# Altium PCB 电源板.PcbDoc
Units mil, origin at the board's own origin, x right, y up, seen from the top; angles counter-clockwise.
Board outline 2515 x 1990 mil, 2 copper layers (Top Layer, Bottom Layer); 44 components, 20 nets, 273 pads, 58 vias.
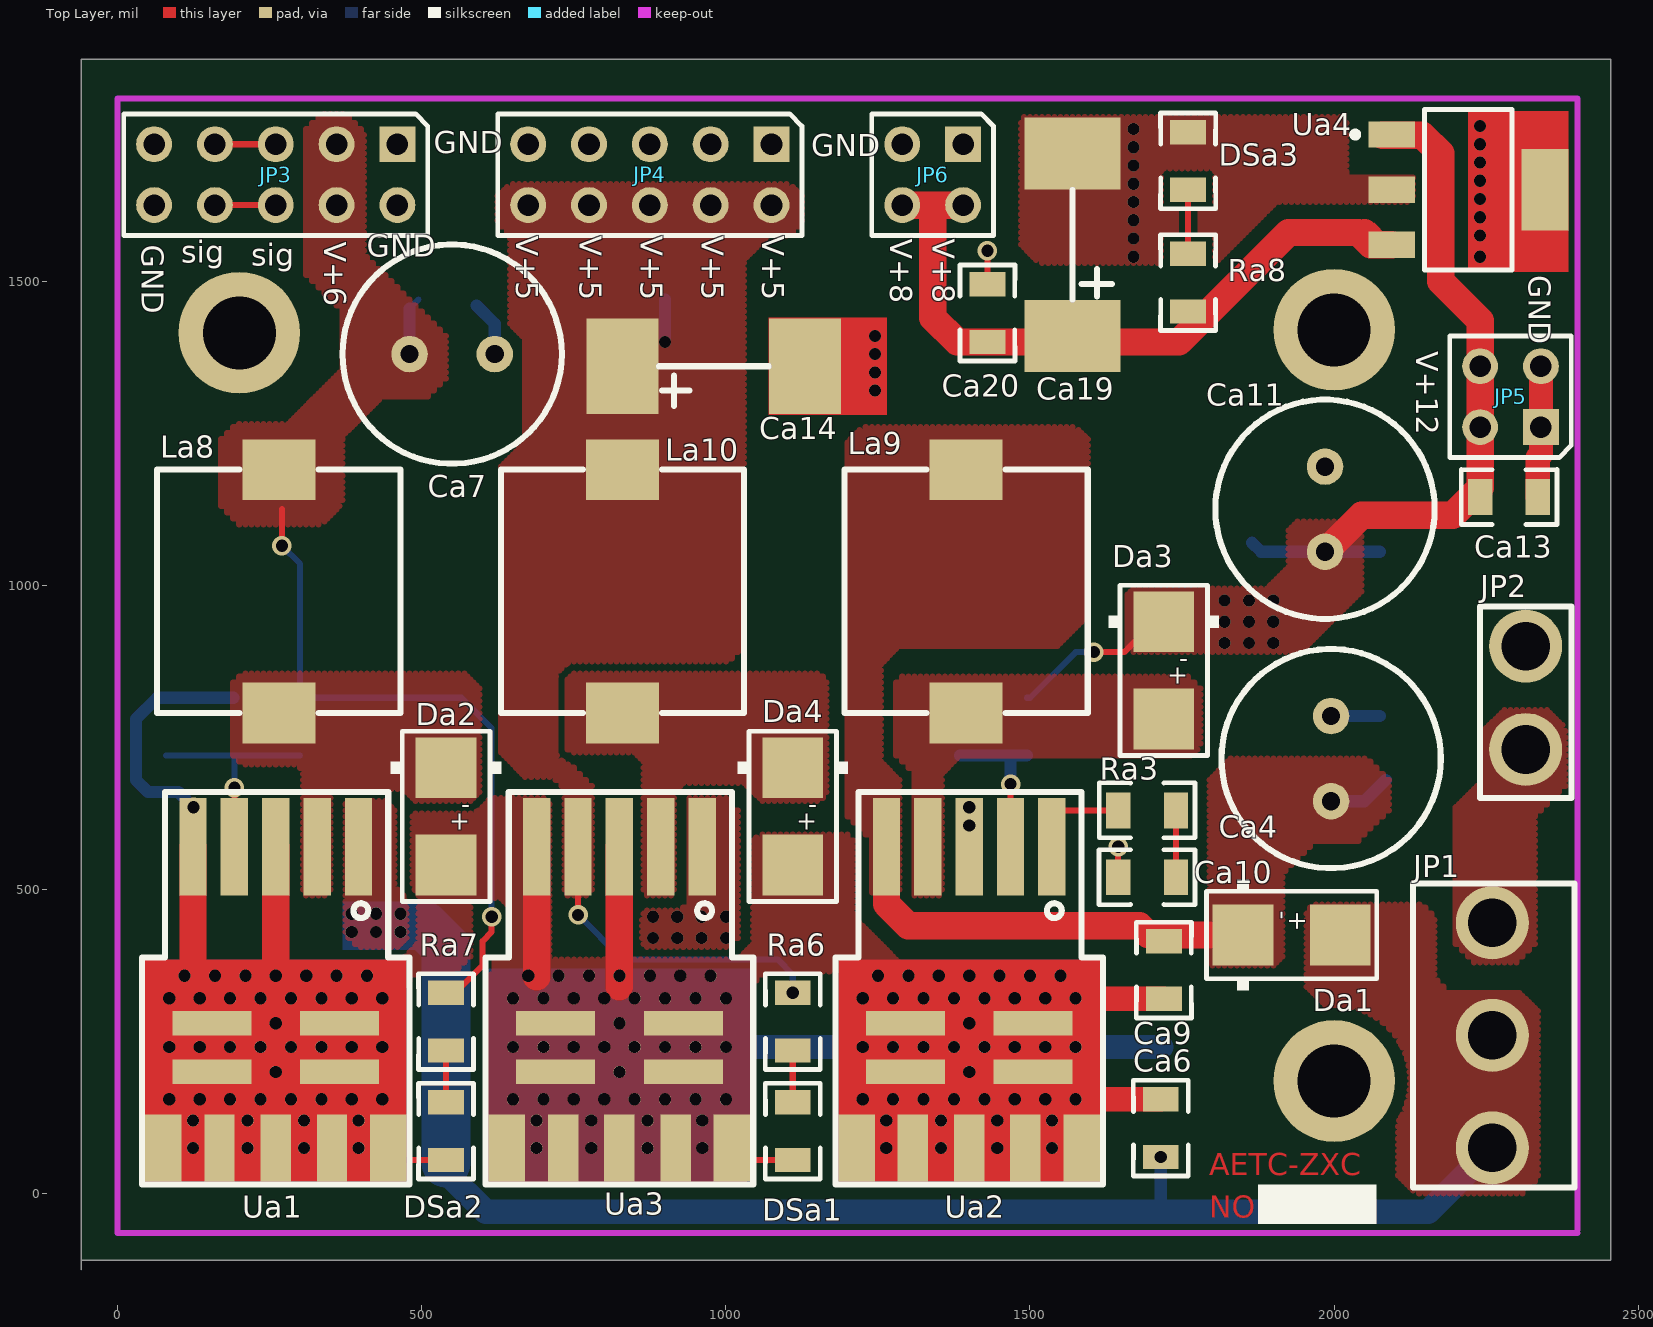
[diagram p0: Top Layer view]
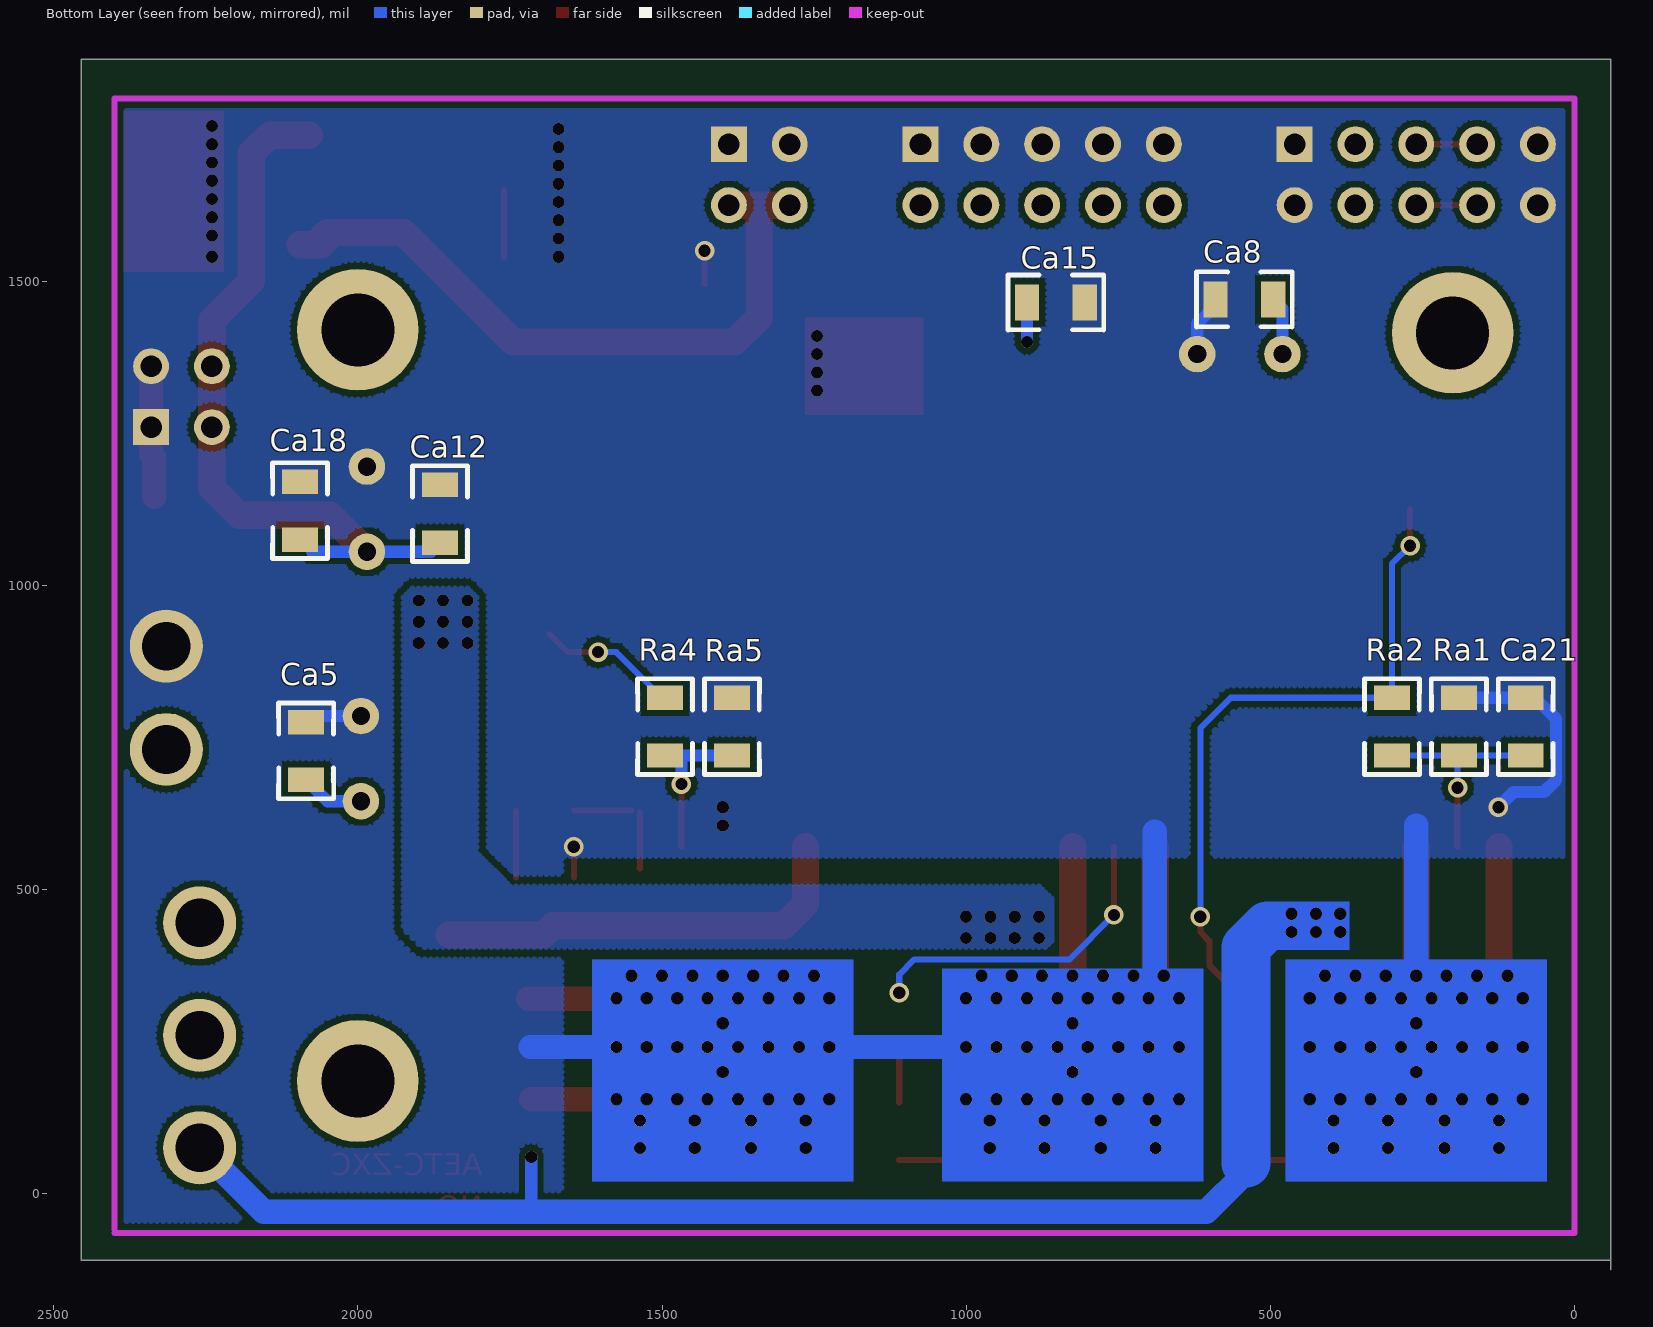
[diagram p1: Bottom Layer view, seen from below]

## Layer stack, top to bottom
Top Layer: signal copper 1.4
Dielectric: dielectric 12.6, FR-4, Dk 4.8
Bottom Layer: signal copper 1.4

## Board outline
-60,-125 -60,1865 2455,1865 2455,-110 -60,-110

## Design rules (kind name [scope] priority, off if disabled: settings)
Clearance [All] p1: gap=10
ComponentClearance [All] p1: gap=0 collisioncheckmode=0
PolygonConnect [All] p1: connectstyle=Direct reliefconductorwidth=10 reliefentries=4 polygonreliefangle="90 Angle"
RoutingLayers [All] p1: top layer=Horizontal bottom layer=Vertical
RoutingVias [All] p1: holewidth=28 width=50 viastyle="Through Hole" minholewidth=28 minwidth=50 maxholewidth=28 maxwidth=50
SolderMaskExpansion [All] p1: expansion=4
TestPointUsage [All] p1: valid=0 allowmultiple=FALSE
Testpoint [All] p1: side=15 testpointundercomponent=TRUE minsize=40 maxsize=100 preferedsize=60 minholesize=0 maxholesize=40 preferedholesize=32 testpointgrid=1 style=1023 order=-539222988
Width [All] p1: maxlimit=80 minlimit=10 preferedwidth=10 toplayer_prefwidth=40 bottomlayer_prefwidth=40 minimp=50.000000 maximp=50.000000 favimp=50.000000
16 further rules are at their usual default settings.

## Components (designator, comment, footprint, x,y, rotation, side; value= is the part's Value field where it differs from the comment)
Ca4 "Cap Pol1" 470U 1995,715 r180 top
Ca5 "Cap" CR2012-0805 2085,725 r90 bottom
Ca6 "Cap" CR2012-0805 1715,105 r90 top
Ca7 "Cap Pol1" 470U 550,1380 r90 top
Ca8 "Cap" CR2012-0805 540,1470 r0 bottom
Ca9 "Cap" CR2012-0805 1720,370 r270 top
Ca10 "Cap" CR2012-0805 1695,520 r180 top
Ca11 "Cap Pol1" 470U 1985,1125 r180 top
Ca12 "Cap" CR2012-0805 1865,1115 r90 bottom
Ca13 "Cap" CR2012-0805 2285,1145 r0 top
Ca14 "Cap Pol1" 100u 980,1360 r270 top
Ca15 "Cap" CR2012-0805 855,1465 r180 bottom
Ca18 "Cap" CR2012-0805 2095,1120 r90 bottom
Ca19 "Cap Pol1" 100u 1570,1560 r0 top
Ca20 "Cap" CR2012-0805 1430,1445 r90 top
Ca21 "Cap" CR2012-0805 80,770 r270 bottom
Da1 "Diode_UFR" DO-214-SMB-YX1 1930,425 r180 top
Da2 "Diode_UFR" DO-214-SMB-YX1 540,620 r90 top
Da3 "Diode_UFR" DO-214-SMB-YX1 1720,860 r90 top
Da4 "Diode_UFR" DO-214-SMB-YX1 1110,620 r90 top
DSa1 "LED1" CR2012-0805 1110,105 r270 top
DSa2 "LED1" CR2012-0805 540,105 r270 top
DSa3 "LED1" CR2012-0805 1760,1695 r90 top
JP1 "Header 3" KG_3 2260,260 r270 top
JP2 "Header 2" CON_X2_B 2315,815 r90 top
JP3 "Header 5X2" HDR2X5 260,1675 r0 top
JP4 "Header 5X2" HDR2X5 875,1675 r0 top
JP5 "Header 2X2" HDR2X2 2290,1310 r270 top
JP6 "Header 2X2" HDR2X2 1340,1675 r0 top
La8 "Inductor" INDUCTOR-YX14 265,990 r180 top
La9 "Inductor" INDUCTOR-YX14 1395,990 r0 top
La10 "Inductor" INDUCTOR-YX14 830,990 r180 top
Ra1 "Res2" CR2012-0805 190,770 r270 bottom
Ra2 "Res2" CR2012-0805 300,765 r90 bottom
Ra3 "Res2" CR2012-0805 1690,630 r0 top
Ra4 "Res2" CR2012-0805 1495,770 r270 bottom
Ra5 "Res2" CR2012-0805 1385,765 r90 bottom
Ra6 "Res3" CR2012-0805 1110,280 r90 top
Ra7 "Res3" CR2012-0805 540,280 r90 top
Ra8 "Res3" CR2012-0805 1760,1500 r270 top
Ua1 "LM2596T-ADJ" LM2596 260,280 r180 top
Ua2 "LM2587T-ADJ" LM2596 1400,280 r180 top
Ua3 "LM2596T-5.0" LM2596 825,280 r180 top
Ua4 "LM2940S8.0" SOT-223 2205,1655 r270 top

## Footprints (in the part's own frame and the unit in brackets; to place one, negate y for a bottom-side part, rotate by r counter-clockwise, add the part's x,y. Pads: shape width x height; smd on the part's side, far side on the other; paste and mask are expansions set on the pad)
100u [mm]
  rect 4x3 smd: 1(0,-3.81) 2(0,3.81)
  silkscreen extent 0,-2.29 1.65,2.29
470U [mil]
  round 60 hole 30: 1(0,70) 2(0,-70)
  silkscreen extent -180,-180 180,180
CON_X2_B [mil]
  round 120 hole 80: 1(85,0) 2(-85,0)
  silkscreen extent -165,-75 150,75
CR2012-0805 [mil]
  rect 40x59.05 smd: 1(-45,0) 2(50,0)
  silkscreen extent -76,-45 81,45
DO-214-SMB-YX1 [mil]
  rect 100x100 smd: 1(-80,0) 2(80,0)
  silkscreen extent -140,-91 140,91
HDR2X2 [mm]
  rect 1.5x1.5 hole 0.9: 1(1.27,1.27)
  round 1.5 hole 0.9: 2(1.27,-1.27) 3(-1.27,1.27) 4(-1.27,-1.27)
  silkscreen extent -2.54,-2.54 2.54,2.54
HDR2X5 [mm]
  rect 1.5x1.5 hole 0.9: 1(5.08,1.27)
  round 1.5 hole 0.9: 2(5.08,-1.27) 3(2.54,1.27) 4(2.54,-1.27) 5(0,1.27) 6(0,-1.27) 7(-2.54,1.27) 8(-2.54,-1.27) 9(-5.08,1.27) 10(-5.08,-1.27)
  silkscreen extent -6.35,-2.54 6.35,2.54
INDUCTOR-YX14 [mil]
  rect 120x100 smd: 1(0,200) 2(0,-200)
  silkscreen extent -200,-200 200,200
KG_3 [mil]
  round 120 hole 80: 1(-185,0) 2(0,0) 3(185,0)
  silkscreen extent -250,-130 250,135
LM2596 [mil]
  rect 45x160 smd: 1(-136,-290) 2(-68,-290) 3(0,-290) 4(68,-290) 5(136,-290)
  rect 60x110 smd: 3(-185,205) 3(185,205)
  round 20 hole 20: 3(-175,125) 3(-175,-41) 3(-175,39) 3(-150,-78) 3(-136.25,160) 3(-136.25,205) 3(-125,125) 3(-125,-41) 3(-125,39) 3(-100,-78) 3(-75,125) 3(-75,-41) 3(-75,39) 3(-50,-78) 3(-46.25,205) 3(-46.25,160) 3(-25,125) 3(-25,39) 3(-25,-41) 3(0,80) 3(0,0) 3(0,-78) 3(25,125) 3(25,39) 3(25,-41) 3(46.25,205) 3(46.25,160) 3(50,-78) 3(75,125) 3(75,-41) 3(75,39) 3(100,-78) 3(125,125) 3(125,-41) 3(125,39) 3(136.25,160) 3(136.25,205) 3(150,-78) 3(175,125) 3(175,-41) 3(175,39)
  rect 130x40 smd: 3(-105,80) 3(-105,0) 3(105,80) 3(105,0)
  rect 50x110 smd: 3(-92.5,205) 3(0,205) 3(92.5,205)
  silkscreen extent -220,-380 220,265
SOT-223 [mm]
  rect 1.1x1.95 smd: 1(-2.183,-2.803) 2(0.117,-2.803) 3(2.417,-2.803)
  rect 3.4x1.95 smd: 2(0.117,3.597)
  silkscreen extent -3.23,-4.45 3.47,2.22

## Part data
Ca4 Ca7 Ca11 Ca14 Ca19: "Polarized Capacitor (Radial)"
Ca5 Ca6 Ca8 Ca9 Ca10 Ca12 Ca13 Ca15 Ca18 Ca20 Ca21: "Capacitor"
Da1 Da2 Da3 Da4: "Ultra-Fast Rectifier Diode"
DSa1 DSa2 DSa3: "Typical RED GaAs LED"
JP1: "Header, 3-Pin"
JP2: "Header, 2-Pin"
JP3 JP4: "Header, 5-Pin, Dual row"
JP5 JP6: "Header, 2-Pin, Dual row"
Ra1 Ra2 Ra3 Ra4 Ra5 Ra6 Ra7 Ra8: "Resistor"
Ua1: library part LM2596T-5.0, "Simple Switcher Power Converter 150 kHz 3A Step Down Voltage Regulator"
Ua2: "Simple Switcher 5A Flyback Regulator"
Ua3: "Simple Switcher Power Converter 150 kHz 3A Step Down Voltage Regulator"
Ua4: "1A Low-Dropout Regulator"

## Free pads (board coordinates)
  round 200 hole 120: 0(200,1415) 0(2000,185) 0(2000,1420)

## Via types
v1: diameter 20, hole 20, Top Layer to Bottom Layer, 48 vias
v2: diameter 32, hole 20, Top Layer to Bottom Layer, 10 vias

## Nets (pads, with @x,y where several pads share a name; then routed paths per layer and width w, separated by ;. In a path a pad name is that pad's centre, name@x,y a point inside that pad or via, vN(x,y) a via of type N, cw(c..) or ccw(c..) an arc to the next point about the centre after c; other vN are vias at no path point)
NetCa10_1: Ca10.1 Ra3.2 | length 110
  Top Layer w10: Ca10.1 Ra3.2
NetCa21_2: Ca21.2 Ra1.2 Ra2.1 Ua1.4 | length 370.8
  Top Layer w10: Ua1.4 v2(192,667)
  Bottom Layer w10: Ca21.2 Ra2.1 ; Ra1.2 192,718 v2(192,667)
NetDa2_2: Da2.2 La8.1 Ua1.2
NetDa3_1: Da3.1 La9.2 Ua2.4
NetDa4_2: Da4.2 La10.1 Ua3.2
NetDSa1_1: DSa1.1 Ra6.1 | length 85
  Top Layer w10: DSa1.1 Ra6.1
NetDSa2_1: DSa2.1 Ra7.1 | length 85
  Top Layer w10: DSa2.1 Ra7.1
NetDSa3_1: DSa3.1 Ra8.1 | length 110
  Top Layer w10: Ra8.1@1760,1540 DSa3.1
NetRa3_1: Ra3.1 Ua2.1 | length 188.4
  Top Layer w10: Ua2.1@1536,626 1536,534 Ua2.1@1537,535 ; Ua2.1@1550,630 Ra3.1
NetRa4_2: Ra4.2 Ra5.1 Ua2.2 | length 257
  Top Layer w10: Ua2.2 v2(1468,673)
  Bottom Layer w20: Ra5.1 Ra4.2 ; v2(1468,673) Ra4.2@1468,717
PGND: Ca4.2 Ca5.2 Ca6.2 Ca7.2 Ca8.2 Ca9.2 Ca10.2 Ca11.2 Ca12.2 Ca13.2 Ca14.2 Ca15.2 Ca18.2 Ca19.2 Ca20.2 Ca21.1 Da2.1 Da4.1 DSa1.2 DSa2.2 DSa3.2 JP2.1 JP3.1 JP3.2 JP3.9 JP3.10 JP4.1 JP4.3 JP4.5 JP4.7 JP4.9 JP5.1 JP5.3 JP6.1 JP6.3 Ra1.1 Ra5.2 Ua1.3 Ua1.5 Ua2.3 Ua3.3 Ua3.5 Ua4.2 | length 3436.8
  Top Layer w10: Ua1.3@455,55 DSa2.2 ; Ua3.3@1010,60 1015,55 DSa1.2 ; Ca20.2 v2(1430,1550) ; Ca10.2 v2(1645,570)
  Top Layer w40: 1600,320 Ca9.2 ; 1605,155 Ca6.2 ; Ca13.2 2335,1210 2340,1215 JP5.3
  Top Layer w45: 124,341 Ua1.5 ; 255,340 260,345 Ua1.3@260,570 ; 689,356 Ua3.5 ; 825,340 Ua3.3@825,570
  Bottom Layer w20: v2(125,635) 100,660 50,660 30,680 30,780 65,815 Ra1.1 ; Ca8.2@590,1460 620,1430 Ca7.2 ; Ca4.2 Ca5.2@2075,785
  Bottom Layer w40: Ua1.3@260,358 260,605 ; 690,345 690,595 ; 981,241 1716,241
  other v1: 1400,605 1400,635 1245,1320 1245,1350 1245,1380 1245,1410 1670,1540 2240,1540 1670,1570 2240,1575 1670,1600 2240,1605 1670,1630 2240,1635 1670,1660 2240,1665 1670,1690 2240,1695 1670,1720 2240,1725 1670,1750 2240,1755 2240,1755
SIG1: JP3.5 JP3.7 | length 100
  Top Layer w10: JP3.7 JP3.5
SIG2: JP3.6 JP3.8 | length 100
  Top Layer w10: JP3.8 JP3.6
V+5D: Ca14.1 Ca15.1 JP4.2 JP4.4 JP4.6 JP4.8 JP4.10 La10.2 Ra6.2 Ua3.4 | length 605.6
  Top Layer w10: v2(757,458) Ua3.4
  Bottom Layer w10: v2(757,458) 830,385 1085,385 1110,360 v2(1110,330)
  Bottom Layer w20: v1(900,1400) Ca15.1@900,1470
V+6P: Ca7.1 Ca8.1 JP3.3 JP3.4 La8.2 Ra2.2 Ra7.2 | length 1229.2
  Top Layer w10: v2(270,1065) 270,1125 ; Ra7.2 555,330 600,375 600,415 615,430 v2(615,455)
  Bottom Layer w10: v2(270,1065) 300,1035 Ra2.2 565,815 615,765 v2(615,455) ; Ca8.1@480,1455 Ca8.1
  Bottom Layer w20: Ca7.1 Ca8.1@480,1455
V+8A: Ca19.1 Ca20.1 JP6.2 JP6.4 Ra8.2 Ua4.3 | length 1182.4
  Top Layer w45: JP6.4 JP6.2 ; 1340,1620 1340,1440 1380,1400 1745,1400 1925,1580 2040,1580 2060.15,1559.85 Ua4.3 ; 2050,1580 2070,1560 Ua4.3@2090,1560
V+12: Ca11.1 Ca12.1 Ca13.1 Ca18.1 Da3.2 JP5.2 JP5.4 Ra4.1 Ua3.1 Ua4.1 | length 1432.5
  Top Layer w10: v2(1605,890) 1655,890 Da3.2@1685,920
  Top Layer w45: Ca11.1 2045,1115 2195,1115 2240,1160 2240,1435 2175,1500 2175,1710 2145,1740 Ua4.1@2080,1740
  Bottom Layer w10: Ra4.1 1500,815 1575,890 v2(1605,890)
  Bottom Layer w20: Ca12.1 1880,1055 Ca18.1@2075,1055
  other v1: 880,420 920,420 960,420 1000,420 880,455 920,455 960,455 1000,455 1820,905 1860,905 1900,905 1820,940 1860,940 1900,940 1820,975 1860,975 1900,975
VBAT: Ca6.1 Da1.1 JP1.2 JP1.3 Ua1.1 | length 2374.9
  Bottom Layer w20: 1715,-30 v1(1715,60)
  Bottom Layer w40: 540,35 605,-30 2155,-30 JP1.3
  Bottom Layer w80: 415,440 505,440 540,405 540,50
  other v1: 385,430 425,430 465,430 385,460 425,460 465,460
VBAT+: JP1.1 JP2.2
VBAT_IN: Ca4.1 Ca5.1 Ca9.1 Da1.2 La9.1 Ua2.5 | length 805.6
  Top Layer w45: Ua2.5 1264,476 1300,440 1680,440 1695,425 Da1.2
  Bottom Layer w20: Ca4.1 2050,645 Ca5.1

## Polygon pours and split planes (outlines as drawn)
VBAT_IN on Top Layer (hatched 90Degree grid 10 track 10, remove dead copper): 1800,375 1900,375 1915,390 1915,525 1970,580 2040,580 2090,630 2090,680 2060,710 2055,715 1830,715 1795,680 1795,375
PGND on Top Layer (hatched 90Degree grid 10 track 10, remove dead copper): 1490,1770 2010,1770 2020,1760 2020,1680 2030,1670 2130,1670 2130,1630 1905,1630 1805,1530 1515,1530 1485,1560 1485,1770
V+5D on Top Layer (hatched 90Degree grid 10 track 10, remove dead copper): 780,490 780,670 725,725 725,855 745,875 1005,875 1030,900 1030,1535 1070,1575 1105,1575 1125,1595 1125,1640 1105,1660 645,1660 625,1640 625,1595 645,1575 645,1430 670,1405 670,1235 630,1195 630,725 670,685 715,685 735,665 735,490
VBAT_IN on Top Layer (hatched 90Degree grid 10 track 10, remove dead copper): 1285,495 1285,680 1255,710 1255,870 1285,900 1545,900 1550,905 1595,950 1595,1240 1575,1260 1225,1260 1200,1235 1200,620 1240,580 1240,495
V+6P on Top Layer (hatched 90Degree grid 10 track 10, remove dead copper): 200,1100 335,1100 370,1135 370,1245 435,1310 510,1310 540,1340 540,1410 405,1545 405,1745 375,1775 335,1775 310,1750 310,1510 370,1450 370,1355 280,1265 195,1265 170,1240 170,1130
NetDa2_2 on Top Layer (hatched 90Degree grid 10 track 10, remove dead copper): 305,490 305,695 295,705 205,705 190,720 190,840 205,855 570,855 595,830 595,660 580,645 490,645 470,665 355,665 350,660 350,490
VBAT on Top Layer (hatched 90Degree grid 10 track 10, remove dead copper): 375,650 375,425 395,405 460,405 475,420 475,485 455,505 455,630 435,650
PGND on Top Layer (hatched 90Degree grid 10 track 10, remove dead copper): 490,590 490,420 435,365 425,355 470,310 465,315 455,325 495,365 555,365 580,390 580,480 595,495 595,590
PGND on Top Layer (hatched 90Degree grid 10 track 10, remove dead copper): 610,20 1040,20 1040,385 610,385
NetDa4_2 on Top Layer (hatched 90Degree grid 10 track 10, remove dead copper): 915,490 915,660 930,675 1030,675 1060,645 1155,645 1165,655 1165,755 1155,765 1165,755 1165,845 1155,855 750,855 740,845 740,730 745,725 850,725 865,710 865,490
PGND on Top Layer (hatched 90Degree grid 10 track 10, remove dead copper): 495,485 630,485 645,470 645,375 710,375 710,650 610,650 590,630 495,630 485,620 485,495
NetDa3_1 on Top Layer (hatched 90Degree grid 10 track 10, remove dead copper): 1395,720 1765,720 1780,735 1780,830 1760,850 1290,850 1280,840 1280,720 1310,690 1310,490 1355,490 1355,690 1385,720
V+12 on Top Layer (hatched 90Degree grid 10 track 10, remove dead copper): 1670,890 1660,900 1660,985 1670,995 1890,995 1915,1020 1925,1030 1925,1090 1940,1105 2025,1105 2045,1085 2045,990 1945,890
VBAT+ on Top Layer (hatched 90Degree grid 10 track 10, remove dead copper): 2230,380 2300,380 2330,410 2330,620 2380,670 2380,765 2350,795 2280,795 2240,755 2240,675 2200,635 2200,410
VBAT on Top Layer (hatched 90Degree grid 10 track 10, remove dead copper): 1955,465 1965,475 2145,475 2165,455 2165,355 2190,330 2305,330 2335,300 2335,25 2310,0 2135,0 2105,30 2105,245 2075,275 2020,275 1955,340
V+12 on Top Layer (hatched 90Degree grid 10 track 10, remove dead copper): 940,650 940,480 925,465 870,465 860,455 860,415 870,405 1005,405 1020,420 1020,630 1000,650
PGND on Top Layer (hatched 90Degree grid 10 track 10, remove dead copper): 960,365 1000,365 1045,410 1045,580 1055,590 1200,590 1210,580 1210,455 1290,375 1290,365 1065,365 1035,335 1030,330 1000,360 1000,365
PGND on Bottom Layer (hatched 90Degree grid 10 track 10, remove dead copper): 0,495 0,1800 2400,1800 2400,-100 1665,-100 1665,555 0,555
V+12 on Bottom Layer (hatched 90Degree grid 10 track 10, remove dead copper): 860,415 870,405 1895,405 1925,435 1925,980 1910,995 1820,995 1805,980 1805,560 1765,520 1750,505 880,505 865,490 860,485

## Keep-outs
Keep-Out Layer:
  lines w10: 2400,-65 0,-65 0,0 0,1800 2400,1800 2400,-60

## Other copper
Top Layer:
  rectangle net PGND: 2220,1515 2385,1780
  rectangle net PGND: 1070,1280 1265,1440
  rectangle net PGND: 45,20 475,385
  rectangle net PGND: 1185,20 1615,385
  text "AETC-ZXC" at 1795,30 h36
  text "NO" at 1795,-40 h36
Bottom Layer:
  rectangle net VBAT: 370,400 480,480
  rectangle net PGND: 45,20 475,385
  rectangle net PGND: 610,20 1040,370
  rectangle net PGND: 1185,20 1615,385

## Silkscreen, mask and mechanical layers (free items; w line width, h text height)
Top Overlay:
  rectangle: 1875,-50 2070,15
  text "GND" at 520,1710 h36
  text "GND" at 1140,1705 h36
  text "V+5" at 655,1575 h36 r270
  text "V+5" at 760,1575 h36 r270
  text "V+5" at 860,1575 h36 r270
  text "V+5" at 960,1575 h36 r270
  text "V+5" at 1060,1575 h36 r270
  text "V+8" at 1270,1570 h36 r270
  text "V+8" at 1340,1570 h36 r270
  text "V+6" at 340,1565 h36 r270
  text "GND" at 40,1560 h36 r270
  text "GND" at 410,1540 h36
  text "sig" at 105,1530 h36
  text "sig" at 220,1525 h36
  text "GND" at 2320,1510 h36 r270
  text "V+12" at 2135,1385 h36 r270

## Text inside footprints (layer, text, board x,y; h text height)
Da1: Top Overlay "+" at 1926,465 h30 r270; Top Overlay "-" at 1902,465 h30 r270
Da2: Top Overlay "-" at 580,648 h30 r180; Top Overlay "+" at 580,624 h30 r180
Da3: Top Overlay "-" at 1760,888 h30 r180; Top Overlay "+" at 1760,864 h30 r180
Da4: Top Overlay "-" at 1150,648 h30 r180; Top Overlay "+" at 1150,624 h30 r180